# Altium PCB AX301_AX4010.PcbDoc (part 8 of 10)
Units mm, origin at the board's own origin, x right, y up, seen from the top; angles counter-clockwise.
Board outline 131.7 x 91.8 mm, 4 copper layers (Top Layer, GND, Mid-Layer 1, Bottom Layer); 191 components, 338 nets, 1108 pads, 420 vias.
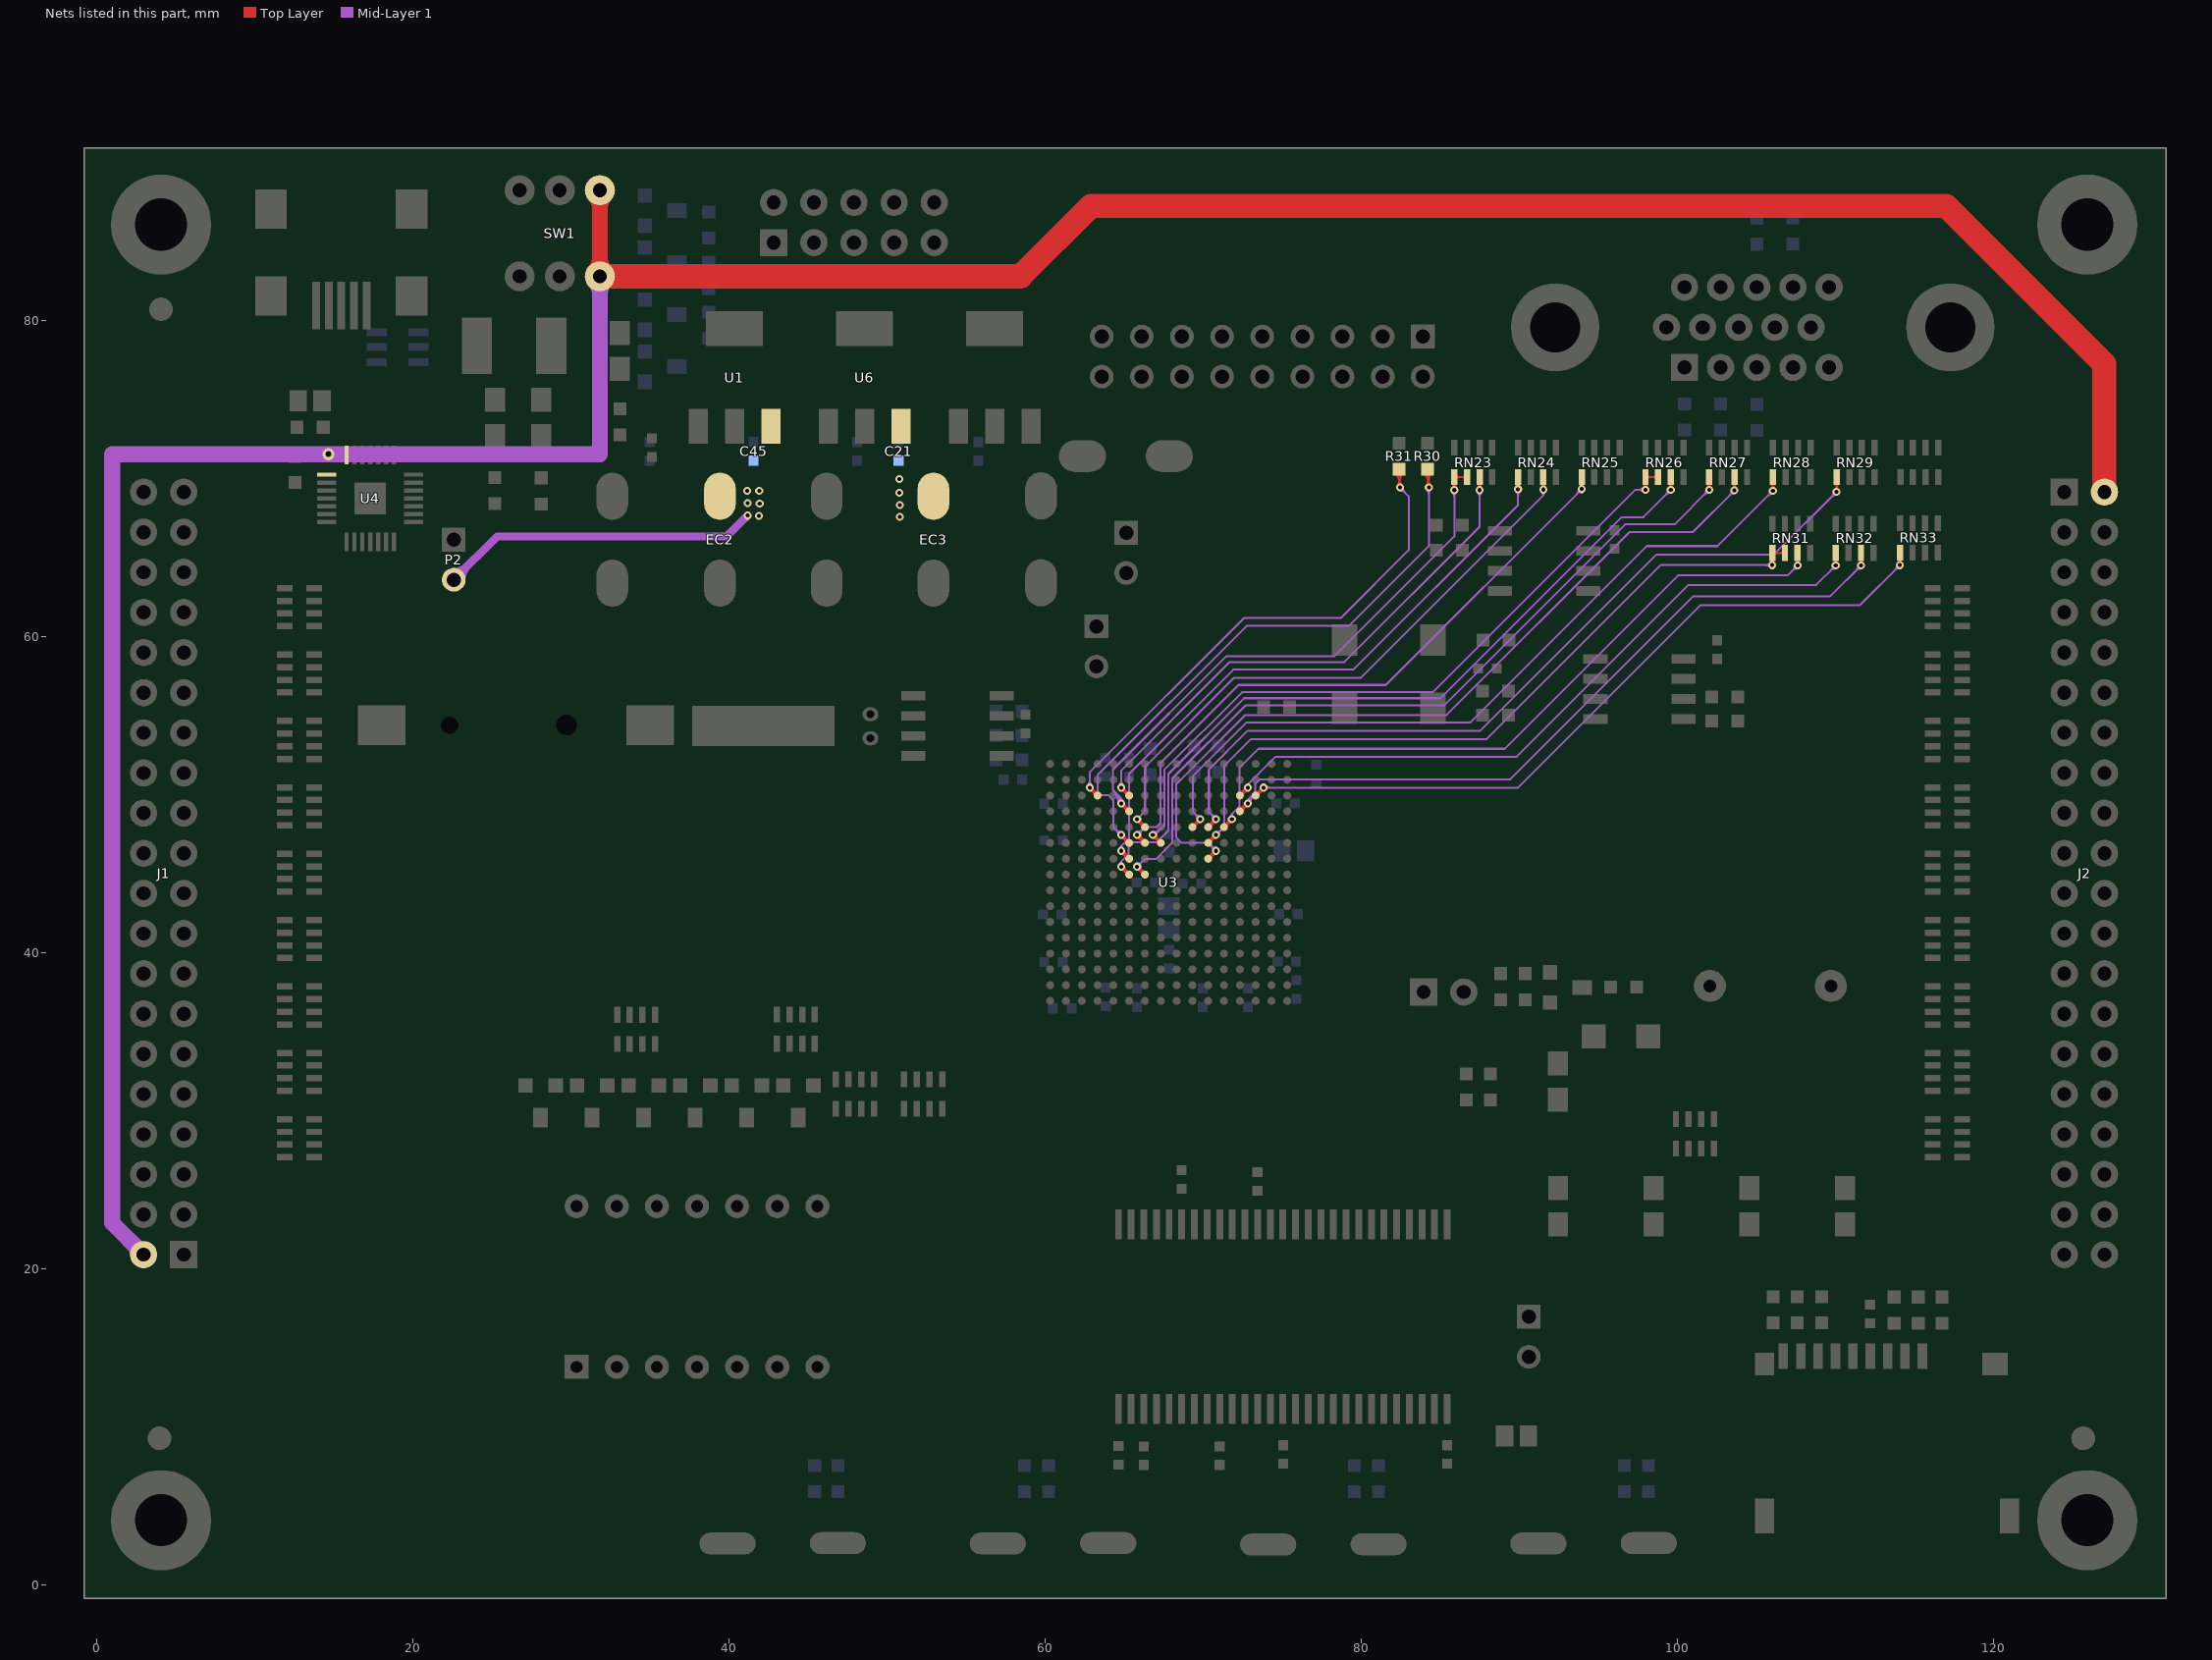
[diagram p10: the nets of this part, all layers, seen from the top]

## Via types
v1: diameter 0.508, hole 0.254, Top Layer to Bottom Layer, 377 vias
v2: diameter 0.762, hole 0.381, Top Layer to Bottom Layer, 41 vias
v3: diameter 1.016, hole 0.508, Top Layer to Bottom Layer, 2 vias

## Nets (pads, with @x,y where several pads share a name; then routed paths per layer and width w, separated by ;. In a path a pad name is that pad's centre, name@x,y a point inside that pad or via, vN(x,y) a via of type N, cw(c..) or ccw(c..) an arc to the next point about the centre after c; other vN are vias at no path point) (continued)
VCC: C21.1 C45.1 EC2.1 EC3.1 J1.2 J2.2 P2.2 SW1.3 SW1.6 U1.3 U4.7 U4.8 U6.3 | length 245.1
  Top Layer w1.016: SW1.3@31.512,83.093 ccw(c30.753,83.852) 31.826,83.852 ccw(c32.899,83.852) SW1.3@32.141,83.093 ; SW1.6@31.512,87.914 cw(c30.753,87.155) 31.826,87.155 cw(c32.899,87.155) SW1.6@32.141,87.914 ; SW1.3@31.826,82.779 SW1.6@31.826,88.229
  Top Layer w1.524: SW1.3@31.826,82.779 58.445,82.779 62.916,87.249 117.018,87.249 127.025,77.241 J2.2@127.025,69.13
  Mid-Layer 1 w0.508: P2.2@22.581,63.576 25.324,66.319 39.853,66.319 v1(41.173,67.64) ; P2.2@22.581,64.072 ccw(c22.581,65.27) 23.427,64.423 ccw(c24.274,63.576) P2.2@23.077,63.576
  Mid-Layer 1 w1.016: 2.336,21.505 cw(c1.701,20.87) J1.2@2.6,20.87 ; J1.2@2.972,20.87 0.965,22.877 0.965,71.526 v2(14.656,71.526) 31.826,71.526 SW1.3@31.826,82.779 SW1.6@31.826,88.229 ; SW1.3@31.512,82.464 cw(c30.753,81.705) 31.826,81.705 cw(c32.899,81.705) SW1.3@32.141,82.464 ; SW1.3@31.512,83.093 ccw(c30.753,83.852) 31.826,83.852 ccw(c32.899,83.852) SW1.3@32.141,83.093 ; SW1.6@31.512,87.914 cw(c30.753,87.155) 31.826,87.155 cw(c32.899,87.155) SW1.6@32.141,87.914
  other v1: 50.8,67.564 41.885,67.615 50.8,68.301 41.935,68.402 41.173,68.428 50.775,69.088 41.148,69.215 41.91,69.215 50.775,69.952
VGA_HSYNC: R30.2 U3.L6 | length 42.9
  Top Layer w0.127: R30.2@83.959,70.319 cw(c83.189,69.549) v1@84.277,69.549 ; R30.2@84.048,70.409 cw(c83.496,69.856) 84.277,69.856 ; v1@84.115,69.518 ccw(c83.635,69.813) 84.183,69.944 ; v1@84.142,69.553 ccw(c83.817,69.878) 84.277,69.878 ccw(c84.737,69.878) v1@84.412,69.553 ; 84.217,69.801 ccw(c84.564,69.884) v1@84.377,69.58 ; v1(84.277,69.418) R30.2@84.277,70.485 ; 84.277,69.917 cw(c84.845,69.917) R30.2@84.443,70.319
  Top Layer w0.254: v1@64.818,47.298 cw(c64.818,46.991) 65.035,47.208 cw(c65.252,47.425) v1@64.945,47.425 ; v1(64.818,47.425) U3.L6@65.318,46.925 ; U3.L6@65.195,46.925 ccw(c64.898,46.925) 65.108,47.135 ccw(c65.318,47.345) U3.L6@65.318,47.048
  Mid-Layer 1 w0.127: v1@64.627,47.425 ccw(c64.168,47.425) 64.493,47.75 ccw(c64.818,48.075) v1@64.818,47.615 ; v1(64.818,47.425) 64.313,47.93 64.313,49.632 63.983,49.962 63.5,49.962 63.322,50.14 63.322,51.232 72.746,60.655 79.223,60.655 84.277,65.71 v1(84.277,69.418) ; v1@84.142,69.283 cw(c83.817,68.958) 84.277,68.958 cw(c84.737,68.958) v1@84.412,69.283
VGA_VSYNC: R31.2 U3.N3 | length 38.6
  Top Layer w0.127: R31.2@82.155,70.319 cw(c81.447,69.611) v1@82.448,69.611 ; R31.2@82.245,70.409 cw(c81.754,69.917) 82.448,69.917 ; v1@82.29,69.524 ccw(c81.83,69.833) 82.37,69.955 ; v1@82.314,69.553 ccw(c81.988,69.878) 82.448,69.878 ccw(c82.908,69.878) v1@82.583,69.553 ; 82.411,69.776 ccw(c82.718,69.846) v1@82.55,69.579 ; v1(82.448,69.418) R31.2@82.448,70.51 ; 82.448,69.856 cw(c83.103,69.856) R31.2@82.64,70.319
  Top Layer w0.254: v1@62.818,50.298 cw(c62.818,49.991) 63.035,50.208 cw(c63.252,50.425) v1@62.945,50.425 ; v1(62.818,50.425) U3.N3@63.318,49.925 ; U3.N3@63.195,49.925 ccw(c62.898,49.925) 63.108,50.135 ccw(c63.318,50.345) U3.N3@63.318,50.048
  Mid-Layer 1 w0.127: v1@62.683,50.559 ccw(c62.358,50.885) 62.818,50.885 ccw(c63.278,50.885) v1@62.953,50.559 ; v1(62.818,50.425) 62.818,51.388 72.593,61.163 78.715,61.163 83.007,65.456 83.007,68.859 v1(82.448,69.418) ; v1@82.448,69.228 cw(c82.448,68.768) 82.774,69.093 cw(c83.099,69.418) v1@82.639,69.418
VGAD0: RN33.5 U3.C3 | length 51.7
  Top Layer w0.127: v1@113.95,64.638 ccw(c113.624,64.963) 114.084,64.963 ccw(c114.544,64.963) v1@114.219,64.638 ; RN33.5@113.988,64.903 cw(c113.755,64.67) 114.084,64.67 cw(c114.414,64.67) RN33.5@114.181,64.903 ; v1@114.018,64.682 ccw(c113.994,64.745) 114.06,64.762 ccw(c114.163,64.79) v1@114.135,64.687 ; v1@114.034,64.687 ccw(c114.005,64.79) 114.109,64.762 ccw(c114.175,64.745) v1@114.151,64.682 ; v1(114.084,64.503) RN33.5@114.084,65.3
  Top Layer w0.254: U3.C3@73.318,49.925 v1(73.818,50.425) ; U3.C3@73.318,50.048 ccw(c73.318,50.345) 73.528,50.135 ccw(c73.738,49.925) U3.C3@73.441,49.925 ; v1@73.691,50.425 cw(c73.384,50.425) 73.601,50.208 cw(c73.818,49.991) v1@73.818,50.298
  Mid-Layer 1 w0.127: v1(73.818,50.425) 89.922,50.425 101.473,61.976 111.557,61.976 v1(114.084,64.503) ; v1@73.953,50.29 cw(c74.278,49.965) 74.278,50.425 cw(c74.278,50.885) v1@73.953,50.559 ; v1@113.894,64.503 cw(c113.434,64.503) 113.759,64.178 cw(c114.084,63.853) v1@114.084,64.313
VGAD1: RN32.7 U3.D4 | length 52
  Top Layer w0.127: v1@111.486,64.613 ccw(c111.16,64.938) 111.62,64.938 ccw(c112.08,64.938) v1@111.755,64.613 ; RN32.7@111.524,64.878 cw(c111.291,64.645) 111.62,64.645 cw(c111.95,64.645) RN32.7@111.717,64.878 ; v1@111.554,64.656 ccw(c111.53,64.72) 111.596,64.737 ccw(c111.699,64.765) v1@111.671,64.662 ; v1@111.57,64.662 ccw(c111.542,64.765) 111.645,64.737 ccw(c111.71,64.72) v1@111.687,64.656 ; v1(111.62,64.478) RN32.7@111.62,65.274
  Top Layer w0.254: U3.D4@72.318,48.925 v1(72.818,49.425) ; U3.D4@72.318,49.048 ccw(c72.318,49.345) 72.528,49.135 ccw(c72.738,48.925) U3.D4@72.441,48.925 ; v1@72.691,49.425 cw(c72.384,49.425) 72.601,49.208 cw(c72.818,48.991) v1@72.818,49.298
  Mid-Layer 1 w0.127: v1@72.755,49.425 cw(c73.153,49.425) 72.871,49.706 ; v1(72.818,49.425) 72.818,49.653 73.304,50.14 ; v1@72.882,49.425 cw(c73.586,49.425) 73.088,49.923 ; v1@73.009,49.425 cw(c74.019,49.425) 73.304,50.14 ; v1@111.43,64.478 cw(c110.97,64.478) 111.295,64.153 cw(c111.62,63.827) v1@111.62,64.287 ; v1(111.62,64.478) 109.677,62.535 101.016,62.535 89.433,50.952 73.584,50.952 73.304,50.673 73.304,50.14
VGAD2: RN32.5 U3.D3 | length 48
  Top Layer w0.127: v1@109.886,64.612 ccw(c109.56,64.938) 110.02,64.938 ccw(c110.48,64.938) v1@110.155,64.612 ; RN32.5@109.924,64.878 cw(c109.691,64.645) 110.02,64.645 cw(c110.35,64.645) RN32.5@110.117,64.878 ; v1@109.954,64.656 ccw(c109.93,64.72) 109.996,64.737 ccw(c110.099,64.765) v1@110.071,64.661 ; v1@109.97,64.661 ccw(c109.941,64.765) 110.045,64.737 ccw(c110.111,64.72) v1@110.087,64.656 ; v1(110.02,64.478) RN32.5@110.02,65.274
  Top Layer w0.254: U3.D3@72.318,49.925 v1(72.818,50.425) ; U3.D3@72.318,50.048 ccw(c72.318,50.345) 72.528,50.135 ccw(c72.738,49.925) U3.D3@72.441,49.925 ; v1@72.691,50.425 cw(c72.384,50.425) 72.601,50.208 cw(c72.818,49.991) v1@72.818,50.298
  Mid-Layer 1 w0.127: v1(72.818,50.425) 72.818,50.618 74.574,52.375 89.84,52.375 100.711,63.246 108.789,63.246 v1(110.02,64.478) ; v1@109.83,64.478 cw(c109.37,64.478) 109.695,64.152 cw(c110.02,63.827) v1@110.02,64.287
VGAD3: RN31.7 U3.E5 | length 49.3
  Top Layer w0.127: v1@107.472,64.613 ccw(c107.147,64.938) 107.607,64.938 ccw(c108.067,64.938) v1@107.742,64.613 ; RN31.7@107.511,64.878 cw(c107.278,64.645) 107.607,64.645 cw(c107.937,64.645) RN31.7@107.704,64.878 ; v1@107.541,64.656 ccw(c107.517,64.72) 107.582,64.737 ccw(c107.686,64.765) v1@107.658,64.662 ; v1@107.557,64.662 ccw(c107.528,64.765) 107.632,64.737 ccw(c107.697,64.72) v1@107.674,64.656 ; v1(107.607,64.478) RN31.7@107.607,65.274
  Top Layer w0.254: U3.E5@71.318,47.925 v1(71.818,48.425) ; U3.E5@71.318,48.048 ccw(c71.318,48.345) 71.528,48.135 ccw(c71.738,47.925) U3.E5@71.441,47.925 ; v1@71.691,48.425 cw(c71.384,48.425) 71.601,48.208 cw(c71.818,47.991) v1@71.818,48.298
  Mid-Layer 1 w0.127: v1@71.723,48.59 ccw(c71.627,48.755) 71.818,48.755 ; v1(71.818,48.425) 71.818,48.755 ; v1@71.913,48.59 cw(c72.009,48.755) 71.818,48.755 ; v1@107.417,64.478 cw(c106.957,64.478) 107.282,64.153 cw(c107.607,63.827) v1@107.607,64.287 ; v1(107.607,64.478) 106.985,63.856 100.051,63.856 89.078,52.883 73.508,52.883 72.288,51.664 72.288,49.225 71.818,48.755
VGAD4: RN31.5 RN31.6 U3.F6 | length 51.5
  Top Layer w0.127: v1@105.872,64.638 ccw(c105.547,64.963) 106.007,64.963 ccw(c106.467,64.963) v1@106.142,64.638 ; RN31.5@105.911,64.878 cw(c105.678,64.645) 106.007,64.645 cw(c106.337,64.645) RN31.5@106.104,64.878 ; v1(106.007,64.503) RN31.5@106.007,65.274 RN31.6@106.807,65.274 ; RN31.5@106.104,65.178 cw(c106.337,64.945) 106.337,65.274 cw(c106.337,65.604) RN31.5@106.104,65.371 ; RN31.6@106.711,65.178 ccw(c106.478,64.945) 106.478,65.274 ccw(c106.478,65.604) RN31.6@106.711,65.371
  Top Layer w0.254: U3.F6@70.318,46.925 v1(70.818,47.425) ; U3.F6@70.318,47.048 ccw(c70.318,47.345) 70.528,47.135 ccw(c70.738,46.925) U3.F6@70.441,46.925 ; v1@70.691,47.425 cw(c70.384,47.425) 70.601,47.208 cw(c70.818,46.991) v1@70.818,47.298
  Mid-Layer 1 w0.127: v1(70.818,47.425) 71.323,47.93 71.323,51.791 73.025,53.492 87.935,53.492 98.945,64.503 v1(106.007,64.503) ; v1@70.818,47.615 ccw(c70.818,48.075) 71.143,47.75 ccw(c71.468,47.425) v1@71.009,47.425 ; v1@105.872,64.368 ccw(c105.547,64.043) 105.547,64.503 ccw(c105.547,64.963) v1@105.872,64.638
VGAD5: RN29.5 U3.F5 | length 55.6
  Top Layer w0.127: v1@109.944,69.279 ccw(c109.619,69.604) 110.078,69.604 ccw(c110.538,69.604) v1@110.213,69.279 ; RN29.5@109.982,69.678 cw(c109.749,69.445) 110.078,69.445 cw(c110.408,69.445) RN29.5@110.175,69.678 ; v1(110.078,69.144) RN29.5@110.078,70.075
  Top Layer w0.254: U3.F5@70.318,47.925 v1(70.818,48.425) ; U3.F5@70.318,48.048 ccw(c70.318,48.345) 70.528,48.135 ccw(c70.738,47.925) U3.F5@70.441,47.925 ; v1@70.691,48.425 cw(c70.384,48.425) 70.601,48.208 cw(c70.818,47.991) v1@70.818,48.298
  Mid-Layer 1 w0.127: v1@70.628,48.425 ccw(c70.168,48.425) 70.493,48.75 ccw(c70.818,49.075) v1@70.818,48.615 ; v1(70.818,48.425) 70.358,48.885 70.358,51.562 72.822,54.026 87.528,54.026 98.679,65.176 106.111,65.176 v1(110.078,69.144) ; v1@109.888,69.144 cw(c109.428,69.144) 109.753,68.819 cw(c110.078,68.494) v1@110.078,68.953
VGAD6: RN28.5 U3.G5 | length 52.9
  Top Layer w0.127: v1@105.912,69.348 ccw(c105.587,69.673) 106.047,69.673 ccw(c106.507,69.673) v1@106.182,69.348 ; RN28.5@105.951,69.678 cw(c105.718,69.445) 106.047,69.445 cw(c106.377,69.445) RN28.5@106.144,69.678 ; v1@105.961,69.383 ccw(c105.872,69.561) 106.064,69.509 ccw(c106.164,69.483) v1@106.123,69.388 ; v1@105.971,69.388 ccw(c105.93,69.483) 106.03,69.509 ccw(c106.222,69.561) v1@106.133,69.383 ; v1(106.047,69.213) RN28.5@106.047,70.075
  Top Layer w0.254: U3.G5@69.318,47.925 v1(69.818,48.425) ; U3.G5@69.318,48.048 ccw(c69.318,48.345) 69.528,48.135 ccw(c69.738,47.925) U3.G5@69.441,47.925 ; v1@69.691,48.425 cw(c69.384,48.425) 69.601,48.208 cw(c69.818,47.991) v1@69.818,48.298
  Mid-Layer 1 w0.127: v1@69.628,48.425 ccw(c69.168,48.425) 69.493,48.75 ccw(c69.818,49.075) v1@69.818,48.615 ; v1(69.818,48.425) 69.342,48.901 69.342,51.156 72.72,54.534 86.893,54.534 98.069,65.71 102.544,65.71 v1(106.047,69.213) ; v1@105.857,69.213 cw(c105.397,69.213) 105.722,68.888 cw(c106.047,68.562) v1@106.047,69.022
VGAD7: RN27.7 U3.F7 | length 55
  Top Layer w0.127: v1@103.481,69.366 ccw(c103.156,69.691) 103.616,69.691 ccw(c104.076,69.691) v1@103.75,69.366 ; RN27.7@103.519,69.678 cw(c103.286,69.445) 103.616,69.445 cw(c103.945,69.445) RN27.7@103.712,69.678 ; v1@103.539,69.406 ccw(c103.471,69.561) 103.635,69.517 ccw(c103.725,69.493) v1@103.689,69.407 ; v1@103.542,69.407 ccw(c103.506,69.493) 103.596,69.517 ccw(c103.761,69.561) v1@103.692,69.406 ; v1(103.616,69.231) RN27.7@103.616,70.075
  Top Layer w0.254: U3.F7@70.318,45.925 v1(70.818,46.425) ; U3.F7@70.318,46.048 ccw(c70.318,46.345) 70.528,46.135 ccw(c70.738,45.925) U3.F7@70.441,45.925 ; v1@70.691,46.425 cw(c70.384,46.425) 70.601,46.208 cw(c70.818,45.991) v1@70.818,46.298
  Mid-Layer 1 w0.127: v1@70.628,46.425 ccw(c70.168,46.425) 70.493,46.75 ccw(c70.818,47.075) v1@70.818,46.615 ; v1(70.818,46.425) 70.303,46.939 68.631,46.939 68.301,47.269 68.301,50.648 72.669,55.016 85.395,55.016 96.977,66.599 100.983,66.599 v1(103.616,69.231) ; v1@103.425,69.231 cw(c102.965,69.231) 103.291,68.906 cw(c103.616,68.581) v1@103.616,69.041
VGAD8: RN27.5 U3.K8 | length 54
  Top Layer w0.127: v1@101.881,69.41 ccw(c101.556,69.735) 102.016,69.735 ccw(c102.476,69.735) v1@102.15,69.41 ; RN27.5@101.919,69.678 cw(c101.686,69.445) 102.016,69.445 cw(c102.345,69.445) RN27.5@102.112,69.678 ; v1@101.949,69.453 ccw(c101.924,69.518) 101.991,69.536 ccw(c102.099,69.565) v1@102.068,69.458 ; v1@101.963,69.458 ccw(c101.933,69.565) 102.04,69.536 ccw(c102.107,69.518) v1@102.083,69.453 ; v1(102.016,69.275) RN27.5@102.016,70.075
  Top Layer w0.254: v1@65.818,45.298 cw(c65.818,44.991) 66.035,45.208 cw(c66.252,45.425) v1@65.945,45.425 ; v1(65.818,45.425) U3.K8@66.318,44.925 ; U3.K8@66.195,44.925 ccw(c65.898,44.925) 66.108,45.135 ccw(c66.318,45.345) U3.K8@66.318,45.048
  Mid-Layer 1 w0.127: v1(65.818,45.425) 66.317,45.923 67.031,45.923 68.047,46.939 68.047,51.003 72.669,55.626 85.242,55.626 96.698,67.081 99.822,67.081 v1(102.016,69.275) ; v1@65.818,45.615 ccw(c65.818,46.075) 66.143,45.75 ccw(c66.468,45.425) v1@66.008,45.425 ; v1@101.825,69.275 cw(c101.365,69.275) 101.691,68.95 cw(c102.016,68.625) v1@102.016,69.085
VGAD9: RN26.7 U3.L8 | length 52.5
  Top Layer w0.127: v1@99.45,69.409 ccw(c99.125,69.735) 99.584,69.735 ccw(c100.044,69.735) v1@99.719,69.409 ; RN26.7@99.488,69.678 cw(c99.255,69.445) 99.584,69.445 cw(c99.914,69.445) RN26.7@99.681,69.678 ; v1@99.517,69.453 ccw(c99.493,69.518) 99.56,69.536 ccw(c99.668,69.565) v1@99.637,69.458 ; v1@99.532,69.458 ccw(c99.501,69.565) 99.609,69.536 ccw(c99.676,69.518) v1@99.651,69.453 ; v1(99.584,69.275) RN26.7@99.584,70.075
  Top Layer w0.254: v1@64.818,45.298 cw(c64.818,44.991) 65.035,45.208 cw(c65.252,45.425) v1@64.945,45.425 ; v1(64.818,45.425) U3.L8@65.318,44.925 ; U3.L8@65.195,44.925 ccw(c64.898,44.925) 65.108,45.135 ccw(c65.318,45.345) U3.L8@65.318,45.048
  Mid-Layer 1 w0.127: v1@64.72,45.588 ccw(c64.618,45.76) 64.818,45.76 ; v1(64.818,45.425) 64.818,45.76 ; v1@64.916,45.588 cw(c65.018,45.76) 64.818,45.76 ; v1@99.394,69.275 cw(c98.934,69.275) 99.259,68.95 cw(c99.584,68.624) v1@99.584,69.084 ; v1(99.584,69.275) 97.848,67.539 96.469,67.539 85.014,56.083 72.593,56.083 67.793,51.283 67.793,47.701 67.056,46.965 65.557,46.965 65.278,46.685 65.278,46.22 64.818,45.76
VGAD10: RN26.5 RN26.6 U3.J6 | length 50
  Top Layer w0.127: v1@97.85,69.409 ccw(c97.525,69.734) 97.984,69.734 ccw(c98.444,69.734) v1@98.119,69.409 ; RN26.5@97.888,69.678 cw(c97.655,69.445) 97.984,69.445 cw(c98.314,69.445) RN26.5@98.081,69.678 ; v1@97.917,69.453 ccw(c97.893,69.518) 97.96,69.536 ccw(c98.068,69.565) v1@98.037,69.458 ; v1@97.932,69.458 ccw(c97.901,69.565) 98.009,69.536 ccw(c98.076,69.518) v1@98.052,69.453 ; v1(97.984,69.275) RN26.5@97.984,70.075 ; RN26.5@98.081,69.978 cw(c98.314,69.745) 98.314,70.075 cw(c98.314,70.404) RN26.5@98.081,70.171 ; RN26.5@98.108,70.075 RN26.6@98.784,70.075 RN26.6@98.908,70.075 ; RN26.6@98.688,69.978 ccw(c98.455,69.745) 98.455,70.075 ccw(c98.455,70.404) RN26.6@98.688,70.171
  Top Layer w0.254: v1@66.818,47.298 cw(c66.818,46.991) 67.035,47.208 cw(c67.252,47.425) v1@66.945,47.425 ; v1(66.818,47.425) U3.J6@67.318,46.925 ; U3.J6@67.195,46.925 ccw(c66.898,46.925) 67.108,47.135 ccw(c67.318,47.345) U3.J6@67.318,47.048
  Mid-Layer 1 w0.127: v1(66.818,47.425) 66.932,47.425 67.539,48.031 67.539,51.537 72.466,56.464 84.531,56.464 97.342,69.275 v1(97.984,69.275) ; v1@66.818,47.488 ccw(c66.818,47.916) 67.121,47.614 ; v1@66.818,47.615 ccw(c66.818,48.35) 67.338,47.83 ; v1@67.008,47.425 cw(c67.194,47.425) 67.063,47.555 ; v1@97.85,69.14 ccw(c97.525,68.815) 97.525,69.275 ccw(c97.525,69.734) v1@97.85,69.409
VGAD11: RN25.5 U3.K6 | length 44.5
  Top Layer w0.127: v1@93.818,69.453 ccw(c93.493,69.778) 93.953,69.778 ccw(c94.413,69.778) v1@94.088,69.453 ; RN25.5@93.857,69.678 cw(c93.624,69.445) 93.953,69.445 cw(c94.283,69.445) RN25.5@94.05,69.678 ; v1(93.953,69.318) RN25.5@93.953,70.075
  Top Layer w0.254: v1@65.818,47.298 cw(c65.818,46.991) 66.035,47.208 cw(c66.252,47.425) v1@65.945,47.425 ; v1(65.818,47.425) U3.K6@66.318,46.925 ; U3.K6@66.195,46.925 ccw(c65.898,46.925) 66.108,47.135 ccw(c66.318,47.345) U3.K6@66.318,47.048
  Mid-Layer 1 w0.127: v1(65.818,47.425) 66.323,47.93 67.031,47.93 67.285,48.184 67.285,51.968 72.238,56.921 81.556,56.921 v1(93.953,69.318) ; v1@65.818,47.615 ccw(c65.818,48.075) 66.143,47.75 ccw(c66.468,47.425) v1@66.008,47.425 ; v1@93.763,69.318 cw(c93.303,69.318) 93.628,68.993 cw(c93.953,68.668) v1@93.953,69.128
VGAD12: RN24.7 U3.K5 | length 39.4
  Top Layer w0.127: v1@91.387,69.42 ccw(c91.062,69.746) 91.522,69.746 ccw(c91.982,69.746) v1@91.656,69.42 ; RN24.7@91.425,69.678 cw(c91.192,69.445) 91.522,69.445 cw(c91.851,69.445) RN24.7@91.618,69.678 ; v1(91.522,69.286) RN24.7@91.522,70.075
  Top Layer w0.254: v1(65.818,48.425) U3.K5@66.318,47.925
  Mid-Layer 1 w0.127: v1(65.818,48.425) 66.319,48.926 66.319,51.74 71.958,57.379 79.985,57.379 91.522,68.916 ; v1@91.411,69.131 cw(c91.258,68.916) 91.522,68.916 ; v1(91.522,69.286) 91.522,68.916 ; v1@91.632,69.131 ccw(c91.786,68.916) 91.522,68.916
VGAD13: RN24.5 U3.L7 | length 42.5
  Top Layer w0.127: v1@89.787,69.446 ccw(c89.462,69.771) 89.922,69.771 ccw(c90.382,69.771) v1@90.056,69.446 ; RN24.5@89.825,69.678 cw(c89.592,69.445) 89.922,69.445 cw(c90.251,69.445) RN24.5@90.018,69.678 ; v1(89.922,69.311) RN24.5@89.922,70.075
  Top Layer w0.254: v1@64.818,46.298 cw(c64.818,45.991) 65.035,46.208 cw(c65.252,46.425) v1@64.945,46.425 ; v1(64.818,46.425) U3.L7@65.318,45.925 ; U3.L7@65.195,45.925 ccw(c64.898,45.925) 65.108,46.135 ccw(c65.318,46.345) U3.L7@65.318,46.048
  Mid-Layer 1 w0.127: v1@64.733,46.595 ccw(c64.663,46.733) 64.818,46.733 ; v1(64.818,46.425) 64.818,46.733 ; v1@64.903,46.595 cw(c64.973,46.733) 64.818,46.733 ; v1@89.787,69.176 cw(c89.462,68.851) 89.922,68.851 cw(c90.382,68.851) v1@90.056,69.176 ; v1(89.922,69.311) 89.922,68.306 79.502,57.887 71.907,57.887 65.303,51.283 65.303,47.219 64.818,46.733
VGAD14: RN23.7 U3.L3 | length 38.1
  Top Layer w0.127: v1@87.356,69.388 ccw(c87.03,69.713) 87.49,69.713 ccw(c87.95,69.713) v1@87.625,69.388 ; RN23.7@87.394,69.678 cw(c87.161,69.445) 87.49,69.445 cw(c87.82,69.445) RN23.7@87.587,69.678 ; v1@87.42,69.43 ccw(c87.39,69.506) 87.469,69.527 ; v1@87.425,69.432 ccw(c87.378,69.563) 87.512,69.527 ; 87.469,69.527 ccw(c87.603,69.563) v1@87.555,69.432 ; v1(87.49,69.253) RN23.7@87.49,70.075 ; 87.512,69.527 ccw(c87.591,69.506) v1@87.561,69.43
  Top Layer w0.254: v1@64.818,50.298 cw(c64.818,49.991) 65.035,50.208 cw(c65.252,50.425) v1@64.945,50.425 ; v1(64.818,50.425) U3.L3@65.318,49.925 ; U3.L3@65.195,49.925 ccw(c64.898,49.925) 65.108,50.135 ccw(c65.318,50.345) U3.L3@65.318,50.048
  Mid-Layer 1 w0.127: v1@64.683,50.559 ccw(c64.358,50.885) 64.818,50.885 ccw(c65.278,50.885) v1@64.953,50.559 ; v1(64.818,50.425) 64.818,51.508 71.679,58.369 78.943,58.369 87.49,66.916 v1(87.49,69.253) ; v1@87.356,69.118 cw(c87.03,68.793) 87.49,68.793 cw(c87.95,68.793) v1@87.625,69.118
VGAD15: RN23.5 RN23.6 U3.L4 | length 42.2
  Top Layer w0.127: v1@85.756,69.388 ccw(c85.43,69.713) 85.89,69.713 ccw(c86.35,69.713) v1@86.025,69.388 ; RN23.5@85.794,69.678 cw(c85.561,69.445) 85.89,69.445 cw(c86.22,69.445) RN23.5@85.987,69.678 ; v1@85.82,69.43 ccw(c85.79,69.506) 85.869,69.527 ccw(c86.003,69.563) v1@85.956,69.432 ; v1@85.825,69.432 ccw(c85.778,69.563) 85.912,69.527 ccw(c85.991,69.506) v1@85.961,69.43 ; v1(85.89,69.253) RN23.5@85.89,70.075 RN23.6@86.69,70.075 ; RN23.5@85.987,69.978 cw(c86.22,69.745) 86.22,70.075 cw(c86.22,70.404) RN23.5@85.987,70.171 ; RN23.6@86.594,69.978 ccw(c86.361,69.745) 86.361,70.075 ccw(c86.361,70.404) RN23.6@86.594,70.171
  Top Layer w0.254: v1@64.818,49.298 cw(c64.818,48.991) 65.035,49.208 cw(c65.252,49.425) v1@64.945,49.425 ; v1(64.818,49.425) U3.L4@65.318,48.925 ; U3.L4@65.195,48.925 ccw(c64.898,48.925) 65.108,49.135 ccw(c65.318,49.345) U3.L4@65.318,49.048
  Mid-Layer 1 w0.127: 64.5,50.054 cw(c63.884,49.439) v1@64.754,49.426 ; v1@64.627,49.428 ccw(c63.466,49.445) 64.287,50.267 ; 64.712,49.842 cw(c64.302,49.432) v1@64.881,49.424 ; v1@64.731,49.594 ccw(c64.659,49.736) 64.818,49.736 ; v1(64.818,49.425) 64.818,49.736 ; v1@64.905,49.594 cw(c64.977,49.736) 64.818,49.736 ; v1@85.756,69.118 cw(c85.43,68.793) 85.89,68.793 cw(c86.35,68.793) v1@86.025,69.118 ; v1(85.89,69.253) 85.89,66.332 78.308,58.75 71.476,58.75 64.287,51.562 64.287,50.267 ; 64.287,50.267 64.818,49.736
pads on no net: Designator13_2.1 Designator13_2_1.1 Designator13_2_2.1 Designator17_2.1 Designator17_2_1.1 Designator17_2_2.1 J3.7 J3.8 J4.4 J4.9 J4.11 J4.12 J4.15 J4.16 J4.17 J6.4 J6.6 J6.7 J6.8 J6.9 RN9.3 RN9.4 RN9.5 RN9.6 RN11.1 RN11.2 RN11.7 RN11.8 RN19.3 RN19.4 RN19.5 RN19.6 RN23.1 RN23.8 RN24.3 RN24.6 RN26.1 RN26.8 RN27.3 RN27.6 RN31.1 RN31.8 RN32.3 RN32.6 SW1.1 SW1.4 U2.4 U2.6 U4.0 U4.1 U4.2 U4.10 U4.11 U4.12 U4.13 U4.14 U4.15 U4.16 U4.17 U4.18 U4.19 U4.20 U4.21 U4.22 U4.23 U4.24 U4.27 U4.28 U9.40 U10.0 U14.10
copper on no net: | length 5901.9